# EAGLE board switch_board (EAGLE 8.1.1)

Size 100 x 80 mm. Coordinates in mm from the lower left corner, seen from the top.
Outline: 0,0 100,0 100,80 0,80 0,0
Copper layers (1*16): Top 0.035mm / dielectric 1.5mm / Bottom 0.035mm
Design rules "default": minimum track width 10mil, minimum drill 24mil, track to track 8mil, track to pad 8mil, pad to pad 8mil, via to via 8mil, smd to smd 8mil, copper to edge 40mil, drill to drill 8mil, minimum pad ring 10mil, minimum via ring 8mil, stop-mask expansion 4mil, vias tented up to drill 0mil, thermal gap 10mil

## Footprints (pad centres in the part's own frame; a part is rotated, then mirrored left to right if it is on the bottom)
C050-024X044 = drill 0.813 octagon: 1 -2.54,0; 2 2.54,0
0207/10 = drill 0.813 octagon: 1 -5.08,0; 2 5.08,0
B3F-10XX = drill 1.016 long: 1 -3.251,2.261; 2 3.251,2.261; 3 -3.251,-2.261; 4 3.251,-2.261
ML6 = drill 0.914 octagon: 1 -2.54,-1.27; 2 -2.54,1.27; 3 0,-1.27; 4 0,1.27; 5 2.54,-1.27; 6 2.54,1.27

## Placement (x,y rotation side)
C1  100nF  [C050-024X044]  8.89,30.48 90 top
C2  100nF  [C050-024X044]  71.12,20.32 0 top
C3  100nF  [C050-024X044]  38.1,7.62 0 top
R1  47k  [0207/10]  26.67,7.62 0 top
R2  47k  [0207/10]  8.89,10.16 0 top
R3  47k  [0207/10]  35.56,30.48 0 top
S1  [B3F-10XX]  17.78,30.48 0 top
S2  [B3F-10XX]  55.88,7.62 0 top
S3  [B3F-10XX]  78.74,39.37 0 top
SV1  [ML6]  53.34,31.75 0 top

## Library data of the parts
C1-C3 R1-R3 = rcl
S1-S3 = switch-omron; MPN: B3F-1000; OC_FARNELL: 176432; OC_NEWARK: 36M3542
SV1 = con-harting-ml; OC_FARNELL: unknown; OC_NEWARK: unknown

## Nets
+3V3: R1.1 R2.1 R3.1 SV1.5
BTN1: C1.2 R1.2 S1.1 SV1.2
BTN2: C2.2 R2.2 S2.1 SV1.3
GND: C1.1 C2.1 C3.1 S1.3 S2.3 S3.3 SV1.6
N$7: SV1.4
RST_BTN: C3.2 R3.2 S3.1 SV1.1

## Tracks (layer width: path | path; a pad name or v marks a point on that pad's centre or on a via)
+3V3  (3 unrouted)
BTN1  (3 unrouted)
BTN2  (3 unrouted)
GND  (6 unrouted)
RST_BTN  (3 unrouted)